# Altium PCB PCB1.PcbDoc
Units mm, origin at the board's own origin, x right, y up, seen from the top; angles counter-clockwise.
Board outline 40 x 85 mm, 2 copper layers (Top Layer, Bottom Layer); 15 components, 12 nets, 46 pads, 23 vias.
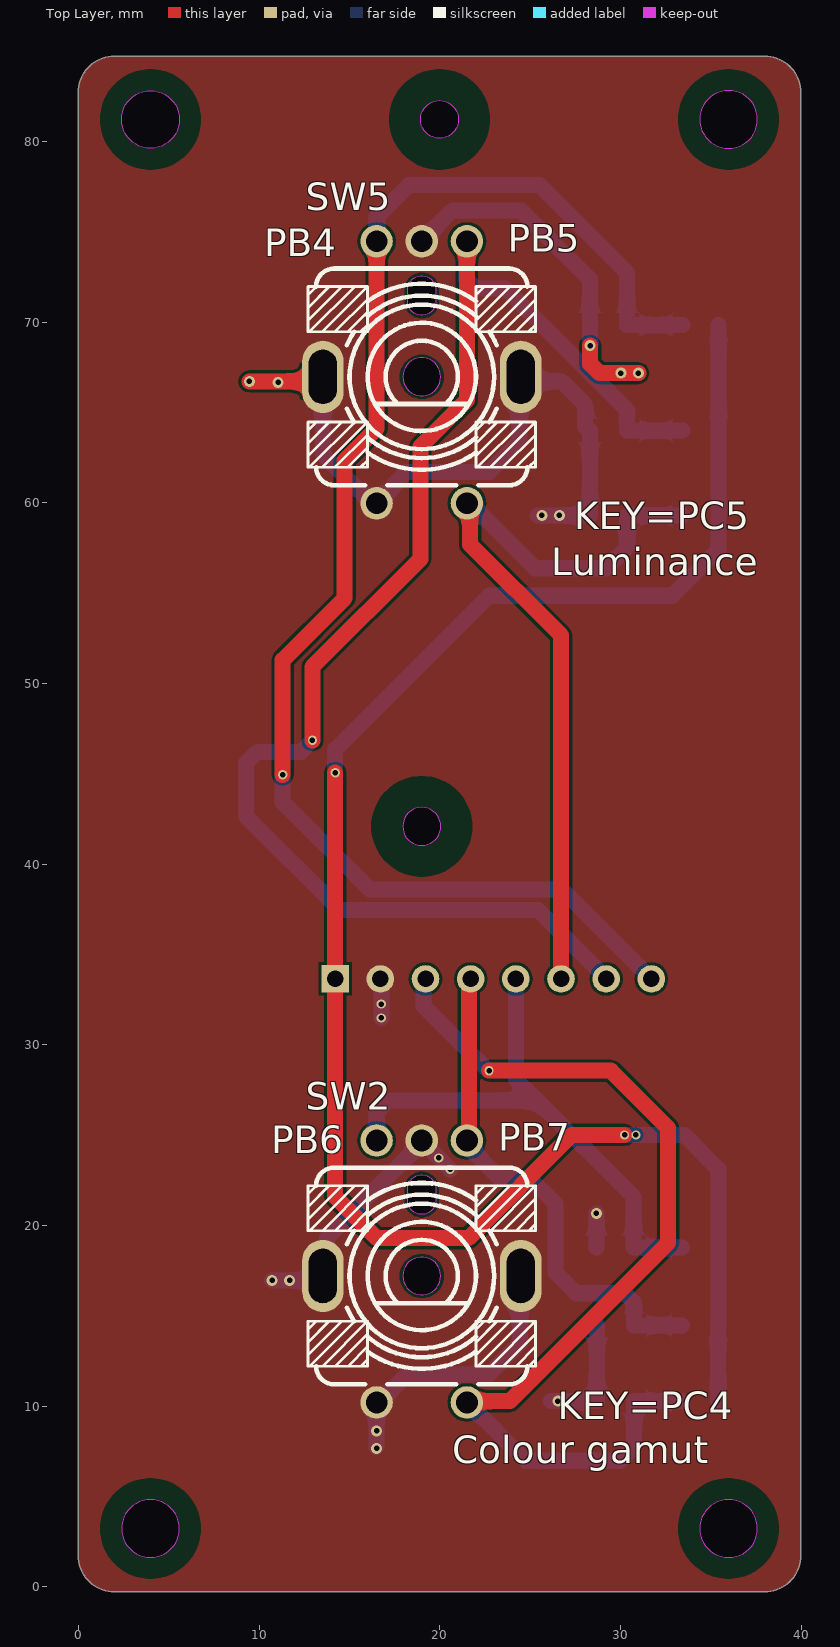
[diagram p0: Top Layer view]
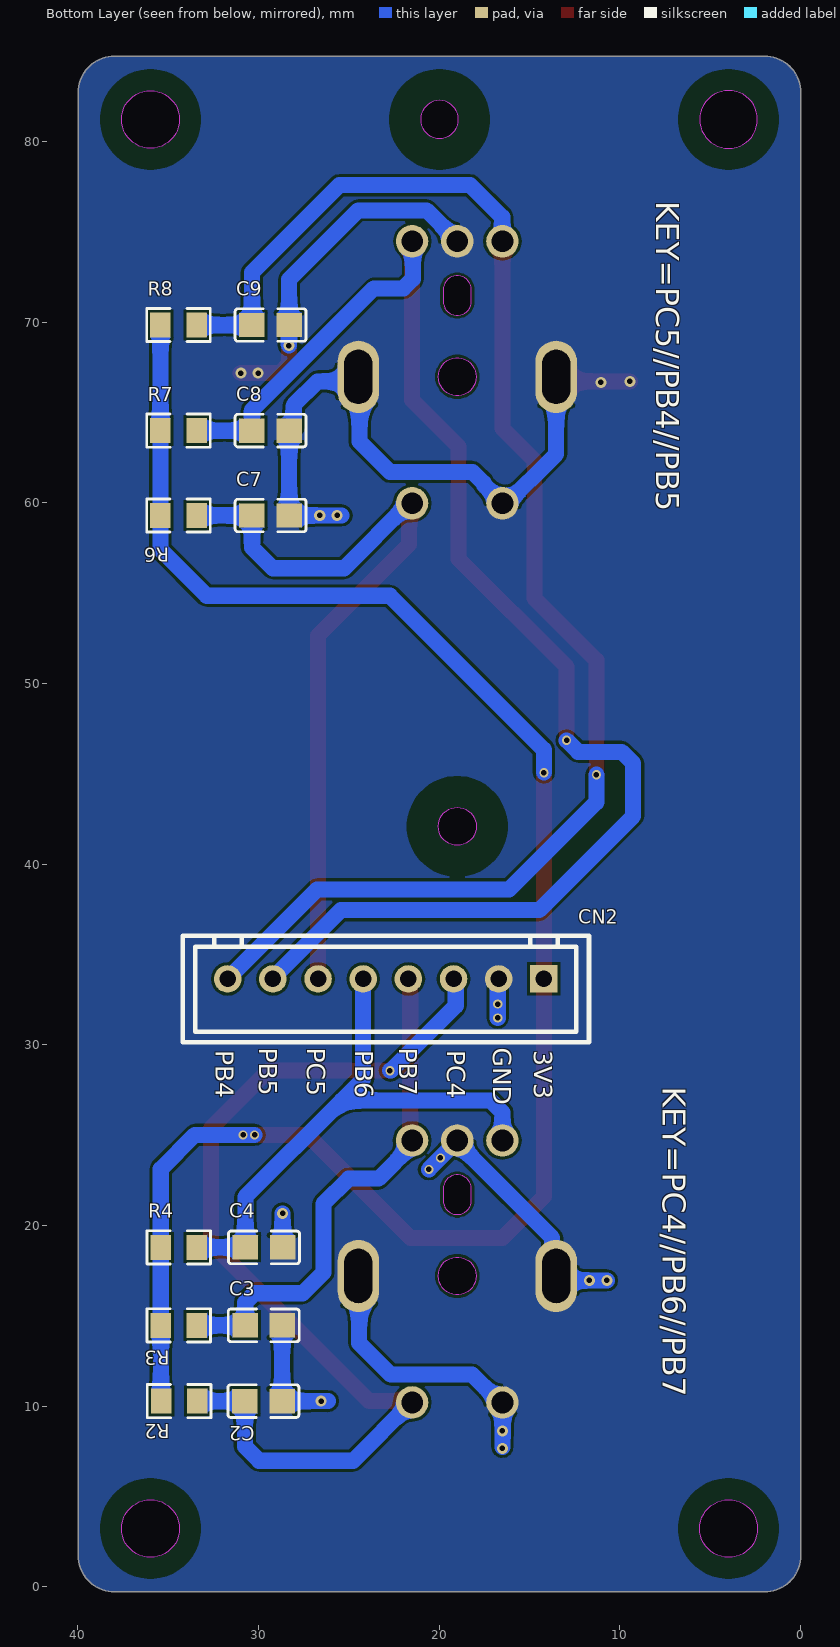
[diagram p1: Bottom Layer view, seen from below]

## Layer stack, top to bottom
Top Solder: solder mask 0.0102, Solder Resist, Dk 3.5
Top Layer: signal copper 0.0356
Dielectric 1: dielectric 0.32, FR-4, Dk 4.8
Bottom Layer: signal copper 0.0356
Bottom Solder: solder mask 0.0102, Solder Resist, Dk 3.5

## Board outline
-0.014,1.73 -0.014,82.73 cw(c1.986,82.73) 1.986,84.73 37.986,84.73 cw(c37.986,82.73) 39.986,82.73 39.986,1.73 cw(c37.986,1.73) 37.986,-0.27 1.986,-0.27 cw(c1.986,1.73)
cut-out: 20.053,42.098 ccw(c19.003,42.098) 19.003,43.148 ccw(c19.003,42.098) 17.953,42.098 ccw(c19.003,42.098) 19.003,41.048 ccw(c19.003,42.098)
cut-out: 34.386,81.23 ccw(c35.986,81.23) 35.986,79.63 ccw(c35.986,81.23) 37.586,81.23 ccw(c35.986,81.23) 35.986,82.83 ccw(c35.986,81.23)
cut-out: 19.986,80.18 cw(c19.986,81.23) 18.936,81.23 cw(c19.986,81.23) 19.986,82.28 cw(c19.986,81.23) 21.036,81.23 cw(c19.986,81.23)
cut-out: 3.986,79.63 cw(c3.986,81.23) 2.386,81.23 cw(c3.986,81.23) 3.986,82.83 cw(c3.986,81.23) 5.586,81.23 cw(c3.986,81.23)
cut-out: 34.386,3.23 ccw(c35.986,3.23) 35.986,1.63 ccw(c35.986,3.23) 37.586,3.23 ccw(c35.986,3.23) 35.986,4.83 ccw(c35.986,3.23)
cut-out: 3.986,1.63 ccw(c3.986,3.23) 5.586,3.23 ccw(c3.986,3.23) 3.986,4.83 ccw(c3.986,3.23) 2.386,3.23 ccw(c3.986,3.23)

## Design rules (kind name [scope] priority, off if disabled: settings)
Clearance [All] p1: gap=0.152 ignorepadtopadclearanceinfootprint=FALSE
ComponentClearance [All] p1: gap=0.152 collisioncheckmode=3 verticalgap=0.152 showdistances=FALSE
HoleSize [All] p1: absolutevalues=TRUE maxlimit=7.62 minlimit=0.025 maxpercent=80.000 minpercent=20.000
HoleToHoleClearance [All] p1: gap=0 allowstackedmicrovias=TRUE
MinimumSolderMaskSliver [All] p1: minsoldermaskwidth=0
PolygonConnect [All] p1: connectstyle=Direct reliefconductorwidth=0.254 reliefentries=4 polygonreliefangle="90 Angle" airgapwidth=0.254
RoutingVias [All] p1: holewidth=0.508 width=0.305 viastyle="Through Hole" minholewidth=0.305 minwidth=0.305 maxholewidth=0.711 maxwidth=1.27
SilkToSilkClearance [All] p1: silktosilkclearance=0
SilkToSolderMaskClearance [IsPad] p1: minsilkscreentomaskgap=0 clearancetoexposedcopper=TRUE
SolderMaskExpansion [All] p1: expansion=0.102
Width Width_1 [InNet('3V3')] p1: maxlimit=5.08 minlimit=0.254 preferedwidth=0.889
Width [All] p2: maxlimit=5.08 minlimit=0.203 preferedwidth=0.203
24 further rules are at their usual default settings.

## Components (designator, comment, footprint, x,y, rotation, side; value= is the part's Value field where it differs from the comment)
C2 "100nF C0805" C0805 29.732,10.287 r0 bottom value=10uF
C3 "100nF C0805" C0805 29.718,14.478 r0 bottom value=10uF
C4 "100nF C0805" C0805 29.704,18.796 r0 bottom value=10uF
C7 "100nF C0805" C0805 29.337,59.309 r0 bottom value=10uF
C8 "100nF C0805" C0805 29.337,64.008 r0 bottom value=10uF
C9 "100nF C0805" C0805 29.337,69.85 r0 bottom value=10uF
CN2 "XH2.54-1*8P" XH2.54-1*8P-CONN-TH_8P-P2.50_HC-XH-8A-G 22.96,33.655 r0 bottom
R2 "10K R0805" R0805 34.401,10.287 r0 bottom value=10kΩ
R3 "10K R0805" R0805 34.417,14.478 r0 bottom value=10kΩ
R4 "10K R0805" R0805 34.417,18.796 r0 bottom value=10kΩ
R6 "10K R0805" R0805 34.433,59.309 r0 bottom value=10kΩ
R7 "10K R0805" R0805 34.433,64.008 r0 bottom value=10kΩ
R8 "10K R0805" R0805 34.433,69.85 r0 bottom value=10kΩ
SW2 "EC11H-7CEXXPXDXXFX" 旋转编码器-有焊盘修改SW-TH_EC11K1524406 19.003,17.213 r180 top
SW5 "EC11H-7CEXXPXDXXFX" 旋转编码器-有焊盘修改SW-TH_EC11K1524406 19.003,66.982 r180 top

## Footprints (in the part's own frame and the unit in brackets; to place one, negate y for a bottom-side part, rotate by r counter-clockwise, add the part's x,y. Pads: shape width x height; smd on the part's side, far side on the other; paste and mask are expansions set on the pad)
C0805 [mm]
  rect 1.41x1.35 smd paste-100 mask+0.051: 1(-1.03,0) 2(1.03,0)
  silkscreen extent -1.96,-0.9 1.96,0.9
R0805 [mm]
  rect 1.133x1.377 smd paste-100 mask+0.051: 1(-1,0) 2(1,0)
  silkscreen extent -1.76,-0.92 1.76,0.92
XH2.54-1*8P-CONN-TH_8P-P2.50_HC-XH-8A-G [mil]
  rect 60x60 hole 36 paste+0 mask+1.97: 1(-344.49,0)
  round 60 hole 36 paste+0 mask+1.97: 2(-246.05,0) 3(-147.64,0) 4(-49.2,0) 5(49.21,0) 6(147.65,0) 7(246.06,0) 8(344.5,0)
  silkscreen extent -443,-94 443,138
旋转编码器-有焊盘修改SW-TH_EC11K1524406 [mm]
  round 1.8 hole 1.2 paste+0 mask+0.051: A(-2.5,-7.5) B(2.5,-7.5) C(0,-7.5) D(-2.5,7) E(2.5,7)
  oval 2.3x4 hole 1.55 slot 3 at 90 deg copper offset 0,0 paste+0 mask+0.051: MH1(-5.475,0)
  oval 2.3x4 hole 1.55 slot 3 at 90 deg paste+0 mask+0.051: MH2(5.475,0)
  Keep-Out Layer board cut-out: 0.775,-4.825 0.698,-5.161 0.483,-5.431 0.172,-5.58 -0.172,-5.58 -0.483,-5.431 -0.698,-5.161 -0.775,-4.825 -0.775,-4.825 -0.775,-4.175 -0.698,-3.839 -0.483,-3.569 -0.172,-3.419 0.172,-3.419 0.483,-3.569 0.698,-3.839 0.775,-4.175 0.775,-4.175
  Keep-Out Layer board cut-out: 1.05,0 0.946,0.456 0.655,0.821 0.234,1.024 -0.234,1.024 -0.655,0.821 -0.946,0.456 -1.05,0 -1.05,0 -0.946,-0.456 -0.655,-0.821 -0.234,-1.024 0.234,-1.024 0.655,-0.821 0.946,-0.456 1.05,0
  silkscreen extent -6.3,-6 6.3,6

## Part data
C2 C3 C4 C7 C8 C9: library part C0805, JLCPCB Part Class="Basic Part", LCSC Part Name="10uF ±10% 25V", Manufacturer=SAMSUNG(三?, Manufacturer Part=CL21A106KAYNNNE, Temperature Coefficient=X5R, Tolerance=±10%, Voltage Rated=25V, Add into BOM=yes, Convert to PCB=yes, Datasheet=https://atta.szlcsc.com/upload/public/pdf/source/20160103/1457707679302.pdf, Device=CL21A106KAYNNNE_C15850, Name=10uF, Supplier=LCSC, Supplier Footprint=0805, Supplier Part=C15850, Symbol=CL21A106KAYNNNE
CN2: "XH2.54-1*8P//直插//C5341207", Current Rating (Max)=3A, JLCPCB Part Class="Extended Part", LCSC Part Name="2.5mm 1x8P ֱ?", Manufacturer=HCTL(»ª², Manufacturer Part=HC-XH-8A-G, Operating Temperature Range=-25℃~+85?, Add into BOM=yes, Convert to PCB=yes, Datasheet=https://atta.szlcsc.com/upload/public/pdf/source/20230105/4FFD2EFD3DA44AA828171A44400F3EDE.pdf, Device=HC-XH-8A-G, Gender=¹«Ð, Mounting Style=ֱ?, Name=HC-XH-8A-G, Number of PINs Per Row=8, Number of Rows=1, Pins Structure=1x8P, Pitch=2.54mm, Reference Series=XH, Row Spacing=2.54mm, Supplier=LCSC, Supplier Footprint=直插,P=2., Supplier Part=C5341207, Symbol=HC-XH-8A-G
R2 R3 R4 R6 R7 R8: library part R0805, JLCPCB Part Class="Basic Part", LCSC Part Name="10K¦¸ ¡", Manufacturer=UNI-ROYAL(厚?, Manufacturer Part=0805W8F1002T5E, Operating Temperature Range=-55℃~+155?, Overload Voltage (Max)=150V, Power(Watts)=1/8W, Temperature Coefficient=±100ppm/?, Tolerance=±1%, Add into BOM=yes, Convert to PCB=yes, Datasheet=https://atta.szlcsc.com/upload/public/pdf/source/20170920/C17414_1505887067106979773.pdf, Device=0805W8F1002T5E_C17414, Name=10kΩ, Supplier=LCSC, Supplier Footprint=0805, Supplier Part=C17414, Symbol=0805W8F1002T5E
SW2 SW5: "EC11H-7CEXXPXDXXFX//宏彦科技", JLCPCB Part Class="Extended Part", LCSC Part Name=±àÂ, Manufacturer=ALPSALPINE(阿尔卑, Manufacturer Part=EC11K1524406, Add into BOM=yes, Convert to PCB=yes, Datasheet=https://atta.szlcsc.com/upload/public/pdf/source/20190620/C398934_DDD5BF6D843226194F24C74B1929B82F.pdf, Device=EC11K1524406, Name=EC11K1524406, Supplier=LCSC, Supplier Footprint=插?, Supplier Part=C398934, Symbol=EC11K1524406

## Via types
v1: diameter 0.61, hole 0.305, Top Layer to Bottom Layer, tented both sides, 13 vias
v2: diameter 0.508, hole 0.305, Top Layer to Bottom Layer, tented both sides, 10 vias

## Nets (pads, with @x,y where several pads share a name; then routed paths per layer and width w, separated by ;. In a path a pad name is that pad's centre, name@x,y a point inside that pad or via, vN(x,y) a via of type N, cw(c..) or ccw(c..) an arc to the next point about the centre after c; other vN are vias at no path point)
3V3: CN2.1 R2.2 R3.2 R4.2 R6.2 R7.2 R8.2 | length 101.1
  Top Layer w0.889: v2(14.21,45.071) CN2.1 14.21,21.604 16.51,19.304 21.59,19.304 27.305,25.019 v2(30.226,25.019)
  Bottom Layer w0.889: v2(14.21,45.071) 14.21,46.341 22.733,54.864 32.871,54.864 35.433,57.426 R6.2 R7.2 R8.2 ; v2(30.226,25.019) v2(30.861,25.019) 33.528,25.019 35.417,23.13 R4.2 R3.2 35.409,14.47 35.409,10.295 R2.2
GND: C2.1 C3.1 C4.1 C7.1 C8.1 C9.1 CN2.2 SW2.C SW2.E SW2.MH1 SW2.MH2 SW5.C SW5.E SW5.MH1 SW5.MH2 | length 101.2
  Top Layer w0.889: v1(9.455,66.732) SW5.MH2@13.528,66.732 ; v1(28.321,68.707) 28.321,67.704 28.842,67.183 v1(30.027,67.183) v1(30.988,67.183)
  Bottom Layer w0.889: v1(10.723,16.963) v1(11.684,16.963) SW2.MH2@13.528,16.963 ; SW2.MH2@13.482,17.031 13.752,17.301 13.752,19.325 SW2.C@18.957,24.531 ; SW5.MH2@13.528,66.732 13.528,62.708 16.504,59.732 16.504,59.979 17.532,61.007 17.532,61.093 18.161,61.722 22.733,61.722 24.41,63.399 24.41,66.664 24.478,66.732 26.74,66.732 28.047,65.425 28.047,64.239 28.277,64.008 C8.1 C7.1 v1(26.615,59.309) v1(25.654,59.309) v1@25.4,59.309 ; SW2.E@16.457,10.031 16.486,8.636 16.504,7.747 16.504,10.078 18.178,11.752 22.686,11.752 24.432,13.497 24.432,17.031 SW2.MH1@24.337,16.937 ; CN2.2 16.764,33.601 v2(16.764,31.496) ; SW2.C 19.004,24.684 v2(20.574,23.114) ; SW5.C@19.004,74.232 19.004,74.503 20.701,76.2 24.483,76.2 28.307,72.376 C9.1 28.321,69.836 v1(28.321,68.707) ; 26.162,10.287 v1(26.543,10.287) C2.1 28.695,10.294 28.695,14.471 C3.1 ; C4.1 v1(28.674,20.673)
  other v1: 16.51,7.675 16.51,8.636 11.049,66.675
  other v2: 19.939,23.749 16.764,32.258
PB4: C9.2 CN2.8 R8.1 SW5.B | length 81.6
  Top Layer w0.889: v2(11.303,44.958) 11.303,51.308 14.732,54.737 14.732,62.357 16.504,64.129 SW5.B@16.504,74.232
  Bottom Layer w0.889: v2(11.303,44.958) 11.303,43.434 16.129,38.608 26.757,38.608 CN2.8 ; SW5.B@16.504,74.232 16.51,74.238 16.51,75.819 18.288,77.597 25.527,77.597 30.367,72.757 C9.2 R8.1
PB5: C8.2 CN2.7 R7.1 SW5.A | length 80.2
  Top Layer w0.889: v2(12.954,46.863) 12.954,50.927 18.923,56.896 18.923,63.119 21.504,65.7 SW5.A@21.504,74.232
  Bottom Layer w0.889: v2(12.954,46.863) 12.319,46.228 9.906,46.228 9.271,45.593 9.271,42.672 14.478,37.465 25.448,37.465 29.21,33.703 CN2.7 ; SW5.A@21.504,74 SW5.A@21.504,74.232 ; SW5.A 21.463,74.441 21.463,72.403 21.984,71.882 23.622,71.882 30.367,65.137 C8.2 R7.1
PB6: C4.2 CN2.5 R4.1 SW2.B | length 31.2
  Bottom Layer w0.889: SW2.B@16.504,24.463 16.504,26.27 17.158,26.924 25.4,26.924 ; CN2.5 24.21,28.114 25.4,26.924 ; R4.1 C4.2 30.734,21.59 25.4,26.924
PB7: C3.2 CN2.4 R3.1 SW2.A | length 28
  Top Layer w0.889: SW2.A 21.607,24.816 21.607,33.552 CN2.4
  Bottom Layer w0.889: SW2.A@21.504,24.463 23.361,22.606 25.019,22.606 26.416,21.209 26.416,17.399 27.559,16.256 30.227,16.256 30.748,15.735 C3.2 R3.1
PC4: C2.2 CN2.3 R2.1 SW2.D | length 55.6
  Top Layer w0.889: SW2.D@21.504,9.963 SW2.D@21.828,10.287 ; SW2.D 21.578,10.287 SW2.D@21.828,10.287 ; v2(22.733,28.575) 29.464,28.575 32.639,25.4 32.639,19.05 23.876,10.287 SW2.D@21.828,10.287
  Bottom Layer w0.889: CN2.3 19.089,33.533 19.089,32.17 22.683,28.575 v2(22.733,28.575) ; SW2.D 21.537,10.213 24.765,6.985 29.972,6.985 30.762,7.775 C2.2 R2.1
PC5: C7.2 CN2.6 R6.1 SW5.D | length 43.9
  Top Layer w0.889: SW5.D@21.504,59.732 21.678,59.558 21.678,57.697 26.71,52.665 CN2.6
  Bottom Layer w0.889: SW5.D 21.679,59.982 25.273,56.388 29.21,56.388 30.367,57.545 C7.2 R6.1
PE2: 
PE3: 
PE6: 
PF10: 

## Polygon pours and split planes (outlines as drawn)
GND on Bottom Layer "Top Layer-No Net" (solid, remove dead copper, pour order 10): -0.014,1.73 -0.014,82.73 cw(c1.986,82.73) 1.986,84.73 37.986,84.73 cw(c37.986,82.73) 39.986,82.73 39.986,1.73 cw(c37.986,1.73) 37.986,-0.27 1.986,-0.27 cw(c1.986,1.73)
GND on Top Layer "Top Layer-No Net1" (solid, remove dead copper, pour order 11): -0.014,1.73 -0.014,82.73 cw(c1.986,82.73) 1.986,84.73 37.986,84.73 cw(c37.986,82.73) 39.986,82.73 39.986,1.73 cw(c37.986,1.73) 37.986,-0.27 1.986,-0.27 cw(c1.986,1.73)

## Other copper
Top Layer:
  pour cut-out: 21.787,42.098 ccw(c19.003,42.098) 19.003,44.881 ccw(c19.003,42.098) 16.22,42.098 ccw(c19.003,42.098) 19.003,39.314 ccw(c19.003,42.098)
  pour cut-out: 19.986,78.447 cw(c19.986,81.23) 17.202,81.23 cw(c19.986,81.23) 19.986,84.014 cw(c19.986,81.23) 22.769,81.23 cw(c19.986,81.23)
  pour cut-out: 33.202,3.23 ccw(c35.986,3.23) 35.986,0.447 ccw(c35.986,3.23) 38.769,3.23 ccw(c35.986,3.23) 35.986,6.014 ccw(c35.986,3.23)
  pour cut-out: 1.202,3.23 ccw(c3.986,3.23) 3.986,0.447 ccw(c3.986,3.23) 6.769,3.23 ccw(c3.986,3.23) 3.986,6.014 ccw(c3.986,3.23)
  pour cut-out: 33.202,81.23 ccw(c35.986,81.23) 35.986,78.447 ccw(c35.986,81.23) 38.769,81.23 ccw(c35.986,81.23) 35.986,84.014 ccw(c35.986,81.23)
  pour cut-out: 3.986,78.447 cw(c3.986,81.23) 1.202,81.23 cw(c3.986,81.23) 3.986,84.014 cw(c3.986,81.23) 6.769,81.23 cw(c3.986,81.23)
Bottom Layer:
  pour cut-out: 21.787,42.098 ccw(c19.003,42.098) 19.003,44.881 ccw(c19.003,42.098) 16.22,42.098 ccw(c19.003,42.098) 19.003,39.314 ccw(c19.003,42.098)
  pour cut-out: 19.986,78.447 cw(c19.986,81.23) 17.202,81.23 cw(c19.986,81.23) 19.986,84.014 cw(c19.986,81.23) 22.769,81.23 cw(c19.986,81.23)
  pour cut-out: 33.202,3.23 ccw(c35.986,3.23) 35.986,0.447 ccw(c35.986,3.23) 38.769,3.23 ccw(c35.986,3.23) 35.986,6.014 ccw(c35.986,3.23)
  pour cut-out: 1.202,3.23 ccw(c3.986,3.23) 3.986,0.447 ccw(c3.986,3.23) 6.769,3.23 ccw(c3.986,3.23) 3.986,6.014 ccw(c3.986,3.23)
  pour cut-out: 33.202,81.23 ccw(c35.986,81.23) 35.986,78.447 ccw(c35.986,81.23) 38.769,81.23 ccw(c35.986,81.23) 35.986,84.014 ccw(c35.986,81.23)
  pour cut-out: 3.986,78.447 cw(c3.986,81.23) 1.202,81.23 cw(c3.986,81.23) 3.986,84.014 cw(c3.986,81.23) 6.769,81.23 cw(c3.986,81.23)

## Silkscreen, mask and mechanical layers (free items; w line width, h text height)
Top Overlay:
  text "PB5" at 23.749,73.914 h1.52
  text "PB4" at 10.287,73.66 h1.52
  text "KEY=PC5" at 27.432,58.547 h1.52
  text "Luminance" at 26.162,56.007 h1.52
  text "PB7" at 23.241,24.13 h1.52
  text "PB6" at 10.668,24.003 h1.52
  text "KEY=PC4" at 26.543,9.271 h1.52
  text "Colour gamut" at 20.701,6.858 h1.52
Bottom Overlay:
  text "KEY=PC5//PB4//PB5" at 8.001,76.708 h1.27 r90
  text "GND" at 17.018,29.845 h1.02 r90
  text "PB7" at 22.225,29.845 h1.02 r90
  text "PC5" at 27.305,29.845 h1.02 r90
  text "PB5" at 29.972,29.845 h1.02 r90
  text "3V3" at 14.732,29.718 h1.02 r90
  text "PC4" at 19.558,29.718 h1.02 r90
  text "PB6" at 24.638,29.718 h1.02 r90
  text "PB4" at 32.385,29.718 h1.02 r90
  text "KEY=PC4//PB6//PB7" at 7.62,27.686 h1.27 r90
Mechanical 1:
  circle w0.013: c35.986,81.23 r1.6
  circle w0.013: c19.986,81.23 r1.05
  circle w0.013: c35.986,3.23 r1.6
  circle w0.013: c3.986,3.23 r1.6
  circle w0.013: c19.003,42.098 r1.05
  circle w0.013: c3.986,81.23 r1.6
  circle w0.013: c35.986,81.23 r1.6
  circle w0.013: c19.986,81.23 r1.05
  circle w0.013: c35.986,3.23 r1.6
  circle w0.013: c3.986,3.23 r1.6
  circle w0.013: c19.003,42.098 r1.05
  circle w0.013: c3.986,81.23 r1.6
  circle w0.203: c35.986,81.23 r1.6
  circle w0.203: c19.986,81.23 r1.05
  circle w0.203: c35.986,3.23 r1.6
  circle w0.203: c3.986,3.23 r1.6
  circle w0.203: c19.003,42.098 r1.05
  circle w0.203: c3.986,81.23 r1.6
  pour cut-out: 3.986,1.63 ccw(c3.986,3.23) 5.586,3.23 ccw(c3.986,3.23) 3.986,4.83 ccw(c3.986,3.23) 2.386,3.23 ccw(c3.986,3.23)
  lines w0.254: -0.014,1.73 ccw(c1.986,1.73) 1.986,-0.27 37.986,-0.27 ccw(c37.986,1.73) 39.986,1.73 39.986,82.73 ccw(c37.986,82.73) 37.986,84.73 1.986,84.73 ccw(c1.986,82.73) -0.014,82.73 -0.014,1.73
Mechanical 2:
  lines w0.013: -0.014,1.73 ccw(c1.986,1.73) 1.986,-0.27 ; -0.014,1.73 ccw(c1.986,1.73) 1.986,-0.27 ; -0.014,1.73 -0.014,82.73 ; -0.014,1.73 -0.014,82.73 ; -0.014,82.73 cw(c1.986,82.73) 1.986,84.73 ccw(c1.986,82.73) -0.014,82.73 ; 1.986,-0.27 37.986,-0.27 ; 1.986,-0.27 37.986,-0.27 ; 37.986,-0.27 ccw(c37.986,1.73) 39.986,1.73 ; 37.986,-0.27 ccw(c37.986,1.73) 39.986,1.73 ; 39.986,1.73 39.986,82.73 ; 39.986,1.73 39.986,82.73 ; 39.986,82.73 ccw(c37.986,82.73) 37.986,84.73 cw(c37.986,82.73) 39.986,82.73
Mechanical 13:
  lines w0.013: 1.986,84.73 37.986,84.73 1.986,84.73